# Altium PCB 电眼主板.PcbDoc (part 3 of 5)
Units mm, origin at the board's own origin, x right, y up, seen from the top; angles counter-clockwise.
Board outline 180 x 100 mm, 2 copper layers (Top Layer, Bottom Layer); 210 components, 262 nets, 810 pads, 212 vias.
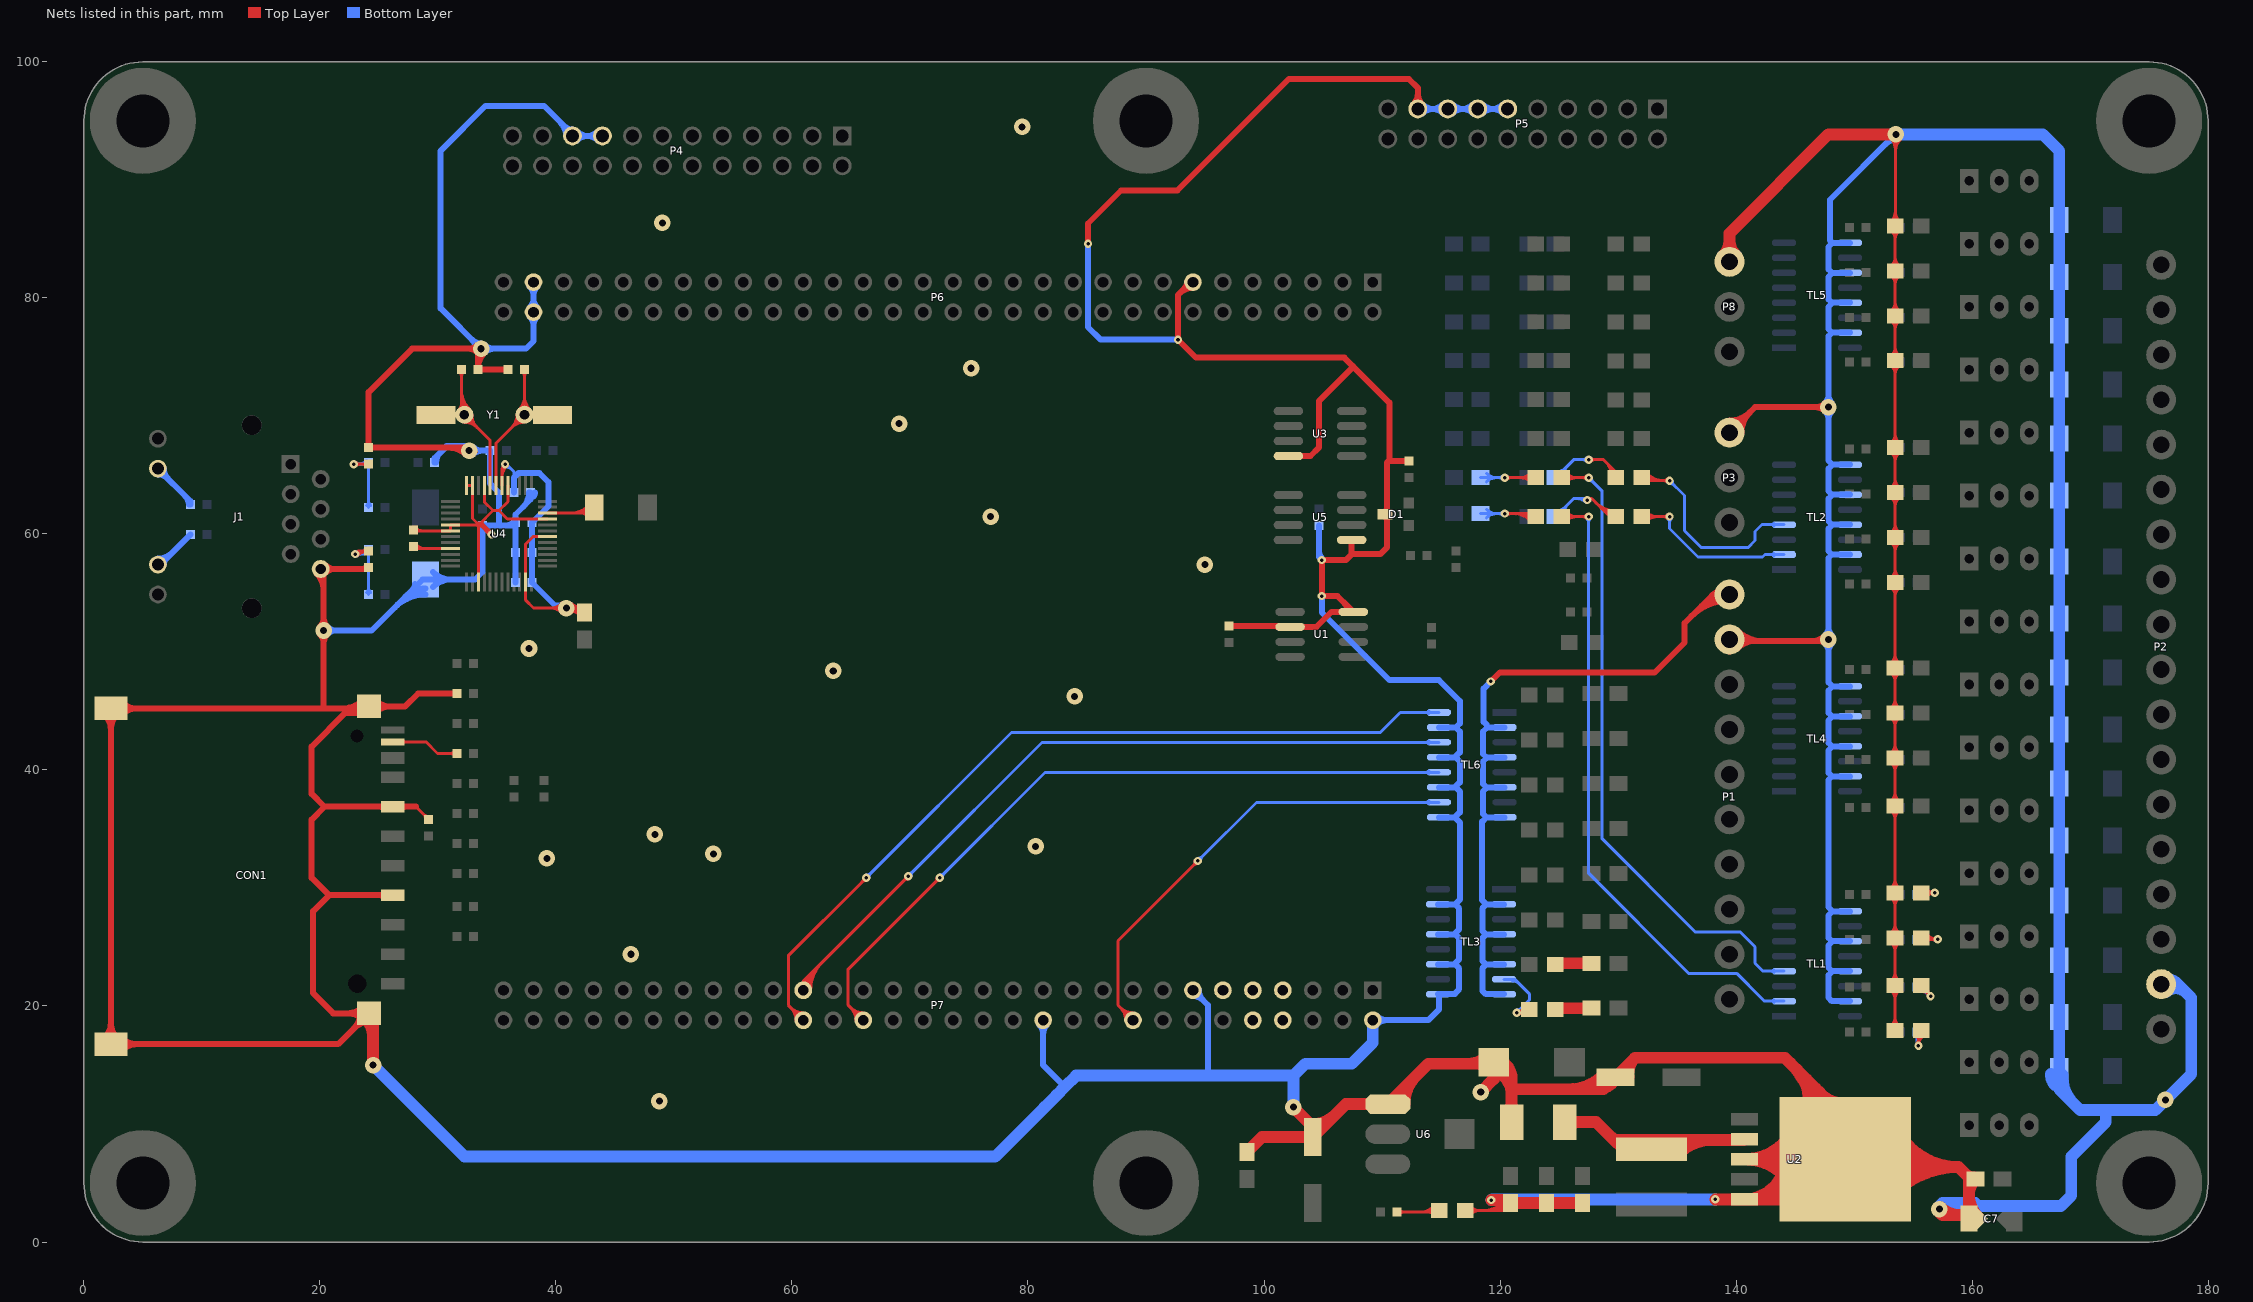
[diagram p3: the nets of this part, all layers, seen from the top]

## Via types
v1: diameter 0.7, hole 0.3, Top Layer to Bottom Layer, 163 vias
v2: diameter 1.4, hole 0.6, Top Layer to Bottom Layer, 49 vias

## Nets (pads, with @x,y where several pads share a name; then routed paths per layer and width w, separated by ;. In a path a pad name is that pad's centre, name@x,y a point inside that pad or via, vN(x,y) a via of type N, cw(c..) or ccw(c..) an arc to the next point about the centre after c; other vN are vias at no path point) (continued)
GND: C1.2 C2.1 C3.1 C4.1 C5.2 C6.2 C7.2 C8.2 C9.1 C10.1 C11.1 C12.2 C13.1 C14.1 C15.1 C16.1 C17.2 C18.2 C19.1 C20.1 CON1.3 CON1.6 CON1.12 CON1.13 CON1.14 CON1.15 CT1.2 CT2.2 D1.3 D2.2 DE1.1 DE2.1 DE3.1 DE4.1 DE5.1 DE6.1 DE7.1 DE8.1 DE9.1 DE10.1 DE11.1 DE12.1 DE13.1 DE14.1 DE15.1 DE16.1 J1.8 LED1.2 LED2.2 LED3.2 LED4.2 LED17.2 LED18.2 LED19.2 LED20.2 LED33.2 LED34.2 LED35.2 LED36.2 LED37.2 LED38.2 LED39.2 LED40.2 P1.9 P2.17 P3.3 P4.17 P4.19 P5.11 P5.13 P5.15 P5.17 P6.13 P6.57 P6.58 P7.2 P7.13 P7.24 P8.3 R26.2 R33.2 R35.1 R38.2 R39.1 TL1.9 TL1.11 TL1.13 TL1.15 TL2.9 TL2.11 TL2.13 TL2.15 TL3.9 TL3.11 TL3.13 TL3.15 TL4.9 TL4.11 TL4.13 TL4.15 TL5.9 TL5.11 TL5.13 TL5.15 TL6.9 TL6.11 TL6.13 TL6.15 U1.2 U1.8 U2.3 U2.5 U2.6 U3.4 U4.5 U4.6 U4.15 U4.33 U4.41 U4.45 U4.47 U4.48 U5.5 U6.1 V1.1 | length 1481.6
  Top Layer w0.254: C8.2@27.997,60.268 U4.6@31.083,60.268 U4.5@31.083,60.768 33.433,60.768 ; C8.2@28.12,60.145 cw(c28.416,59.849) 28.416,60.268 ; C8.2@28.12,60.505 ccw(c28.691,61.076) 28.691,60.268 ; 28.14,36.884 C2.1@29.21,35.814 ; C2.1@28.956,35.814 ccw(c28.343,35.814) 28.776,36.248 ccw(c29.21,36.681) C2.1@29.21,36.068 ; U4.48@32.433,64.118 U4.47@32.933,64.118 32.933,61.298 33.433,60.798 33.433,60.768 ; v2@32.433,66.85 v2(32.639,67.056) 32.766,66.929 v2@33.274,66.929 ; U4.15@33.433,55.918 33.433,60.768 ; U4.45@33.933,64.118 33.933,62.714 34.671,61.976 ; U4.41@35.933,64.118 35.933,62.73 35.179,61.976 ; U4.33@39.283,61.268 35.887,61.268 35.179,61.976 ; D2.2@117.043,2.667 120.269,2.667 C10.1@120.904,3.302 ; D2.2@117.467,2.308 cw(c118.335,1.441) 118.335,2.667 cw(c118.335,3.893) D2.2@117.467,3.026 ; 118.451,2.667 ccw(c118.451,5.628) C10.1@120.545,3.534 ; 119.064,2.667 ccw(c119.064,5.015) C10.1@120.724,3.355 ; 119.678,2.667 ccw(c119.678,4.401) C10.1@120.904,3.175 ; C10.1@120.291,2.667 ccw(c120.291,3.788) C10.1@121.084,2.995 ; P8.3@139.446,83.058 P8.3@139.446,83.185 ; LED1.2@153.108,18.266 ccw(c152.24,19.133) 153.467,19.133 ccw(c154.693,19.133) LED1.2@153.826,18.266 ; LED2.2@153.108,21.358 cw(c152.24,20.491) 153.467,20.491 cw(c154.693,20.491) LED2.2@153.826,21.358 ; LED2.2@153.108,22.076 ccw(c152.24,22.943) 153.467,22.943 ccw(c154.693,22.943) LED2.2@153.826,22.076 ; LED3.2@153.108,25.422 cw(c152.24,24.555) 153.467,24.555 cw(c154.693,24.555) LED3.2@153.826,25.422 ; LED3.2@153.108,26.14 ccw(c152.24,27.007) 153.467,27.007 ccw(c154.693,27.007) LED3.2@153.826,26.14 ; LED4.2@153.108,29.232 cw(c152.24,28.365) 153.467,28.365 cw(c154.693,28.365) LED4.2@153.826,29.232 ; LED4.2@153.108,29.95 ccw(c152.24,30.817) 153.467,30.817 ccw(c154.693,30.817) LED4.2@153.826,29.95 ; LED17.2@153.108,36.598 cw(c152.24,35.731) 153.467,35.731 cw(c154.693,35.731) LED17.2@153.826,36.598 ; LED17.2@153.108,37.316 ccw(c152.24,38.183) 153.467,38.183 ccw(c154.693,38.183) LED17.2@153.826,37.316 ; LED18.2@153.108,40.662 cw(c152.24,39.795) 153.467,39.795 cw(c154.693,39.795) LED18.2@153.826,40.662 ; LED18.2@153.108,41.38 ccw(c152.24,42.247) 153.467,42.247 ccw(c154.693,42.247) LED18.2@153.826,41.38 ; LED19.2@153.108,44.472 cw(c152.24,43.605) 153.467,43.605 cw(c154.693,43.605) LED19.2@153.826,44.472 ; LED19.2@153.108,45.19 ccw(c152.24,46.057) 153.467,46.057 ccw(c154.693,46.057) LED19.2@153.826,45.19 ; LED20.2@153.108,48.282 cw(c152.24,47.415) 153.467,47.415 cw(c154.693,47.415) LED20.2@153.826,48.282 ; LED20.2@153.108,49 ccw(c152.24,49.867) 153.467,49.867 ccw(c154.693,49.867) LED20.2@153.826,49 ; LED33.2@153.133,55.521 cw(c152.326,54.714) 153.467,54.714 ; LED33.2@153.133,56.239 ccw(c152.326,57.046) 153.467,57.046 ; LED34.2@153.133,59.331 cw(c152.326,58.524) 153.467,58.524 ; LED34.2@153.133,60.049 ccw(c152.326,60.856) 153.467,60.856 ; LED35.2@153.133,63.141 cw(c152.326,62.334) 153.467,62.334 ; LED35.2@153.133,63.859 ccw(c152.326,64.666) 153.467,64.666 ; LED36.2@153.133,66.951 cw(c152.326,66.144) 153.467,66.144 ; LED36.2@153.133,67.669 ccw(c152.326,68.476) 153.467,68.476 ; LED37.2@153.133,74.317 cw(c152.326,73.51) 153.467,73.51 ; LED37.2@153.133,75.035 ccw(c152.326,75.842) 153.467,75.842 ; LED38.2@153.133,78.127 cw(c152.326,77.32) 153.467,77.32 ; LED38.2@153.133,78.845 ccw(c152.326,79.652) 153.467,79.652 ; LED39.2@153.133,81.937 cw(c152.326,81.13) 153.467,81.13 ; LED39.2@153.133,82.655 ccw(c152.326,83.462) 153.467,83.462 ; LED40.2@153.133,85.747 cw(c152.326,84.94) 153.467,84.94 ; LED40.2@153.133,86.465 ccw(c152.266,87.332) 153.492,87.332 ccw(c154.718,87.332) LED40.2@153.851,86.465 ; v2@153.138,93.448 cw(c152.283,92.593) 153.492,92.593 ; LED1.2@153.467,17.907 LED2.2@153.467,21.717 LED3.2@153.467,25.781 LED4.2@153.467,29.591 LED17.2@153.467,36.957 LED18.2@153.467,41.021 LED19.2@153.467,44.831 LED20.2@153.467,48.641 153.467,63.5 153.467,74.676 153.467,86.081 LED40.2@153.492,86.106 153.492,93.802 v2(153.543,93.853) ; 153.467,54.593 cw(c154.779,54.593) LED33.2@153.851,55.521 ; 153.467,55.206 cw(c154.166,55.206) LED33.2@153.672,55.7 ; 153.467,56.554 ccw(c154.166,56.554) LED33.2@153.672,56.06 ; 153.467,57.167 ccw(c154.779,57.167) LED33.2@153.851,56.239 ; 153.467,58.403 cw(c154.779,58.403) LED34.2@153.851,59.331 ; 153.467,59.016 cw(c154.166,59.016) LED34.2@153.672,59.51 ; 153.467,60.364 ccw(c154.166,60.364) LED34.2@153.672,59.87 ; 153.467,60.977 ccw(c154.779,60.977) LED34.2@153.851,60.049 ; 153.467,62.213 cw(c154.779,62.213) LED35.2@153.851,63.141 ; 153.467,62.826 cw(c154.166,62.826) LED35.2@153.672,63.32 ; 153.467,64.174 ccw(c154.166,64.174) LED35.2@153.672,63.68 ; 153.467,64.787 ccw(c154.779,64.787) LED35.2@153.851,63.859 ; 153.467,66.023 cw(c154.779,66.023) LED36.2@153.851,66.951 ; 153.467,66.636 cw(c154.166,66.636) LED36.2@153.672,67.13 ; 153.467,67.984 ccw(c154.166,67.984) LED36.2@153.672,67.49 ; 153.467,68.597 ccw(c154.779,68.597) LED36.2@153.851,67.669 ; 153.467,73.389 cw(c154.779,73.389) LED37.2@153.851,74.317 ; 153.467,74.002 cw(c154.166,74.002) LED37.2@153.672,74.496 ; 153.467,75.35 ccw(c154.166,75.35) LED37.2@153.672,74.856 ; 153.467,75.963 ccw(c154.779,75.963) LED37.2@153.851,75.035 ; 153.467,77.199 cw(c154.779,77.199) LED38.2@153.851,78.127 ; 153.467,77.812 cw(c154.166,77.812) LED38.2@153.672,78.306 ; 153.467,79.16 ccw(c154.166,79.16) LED38.2@153.672,78.666 ; 153.467,79.773 ccw(c154.779,79.773) LED38.2@153.851,78.845 ; 153.467,81.009 cw(c154.779,81.009) LED39.2@153.851,81.937 ; 153.467,81.622 cw(c154.166,81.622) LED39.2@153.672,82.116 ; 153.467,82.97 ccw(c154.166,82.97) LED39.2@153.672,82.476 ; 153.467,83.583 ccw(c154.779,83.583) LED39.2@153.851,82.655 ; 153.467,84.819 cw(c154.779,84.819) LED40.2@153.851,85.747 ; 153.467,85.432 cw(c154.166,85.432) LED40.2@153.672,85.926 ; 153.492,92.347 cw(c155.049,92.347) v2@153.948,93.448 ; 153.492,92.96 cw(c154.436,92.96) v2@153.769,93.627 ; 33.433,60.768 33.463,60.768 33.493,60.798 34.671,61.976 ; 34.671,61.976 35.179,61.976
  Top Layer w0.508: CON1.15@1.758,17.292 ccw(c0.485,18.565) 2.286,18.565 ccw(c4.087,18.565) CON1.15@2.814,17.292 ; CON1.14@1.758,44.684 cw(c0.485,43.411) 2.286,43.411 cw(c4.087,43.411) CON1.14@2.814,44.684 ; CON1.14@2.458,45.384 CON1.14@2.286,45.212 ; CON1.15@3.213,16.236 cw(c4.487,14.963) 4.487,16.764 cw(c4.487,18.565) CON1.15@3.213,17.292 ; CON1.14@3.213,44.684 cw(c4.487,43.411) 4.487,45.212 cw(c4.487,47.013) CON1.14@3.213,45.74 ; J1.8@19.707,56.669 cw(c18.226,55.188) 20.32,55.188 ; v2@20.005,51.501 cw(c19.243,50.739) 20.32,50.739 cw(c21.397,50.739) v2@20.635,51.501 ; v2@20.005,52.131 ccw(c19.243,52.893) 20.32,52.893 ccw(c21.397,52.893) v2@20.635,52.131 ; J1.8@20.425,56.669 cw(c21.292,55.802) 21.292,57.028 cw(c21.292,58.254) J1.8@20.425,57.387 ; 21.946,45.212 ccw(c21.946,47.6) CON1.13@23.635,45.912 ; 22.776,45.212 cw(c22.776,43.998) CON1.13@23.635,44.857 ; 22.945,44.831 ccw(c22.945,45.924) CON1.13@23.944,45.481 ; CON1.13@23.172,45.212 ccw(c23.172,46.374) CON1.13@23.994,45.552 ; CON1.12@23.416,19.384 cw(c21.615,19.384) 22.889,18.111 cw(c24.162,16.837) CON1.12@24.162,18.638 ; CON1.13@23.48,45.687 cw(c22.164,46.271) 22.164,44.831 ; 23.529,57.028 ccw(c23.529,57.751) C20.1@24.04,57.24 ; CON1.12@23.635,18.857 ccw(c22.361,17.583) 22.361,19.384 ccw(c22.361,21.185) CON1.12@23.635,19.912 ; CON1.13@23.876,44.831 22.164,44.831 ; C20.1@24.13,57.15 24.008,57.028 J1.8@20.066,57.028 20.32,56.774 v2(20.32,51.816) 20.32,45.212 ; CON1.13@24.162,45.212 20.32,45.212 ; CON1.13@24.162,45.384 27.223,45.384 28.321,46.482 R26.2@31.623,46.482 ; CON1.13@24.69,44.857 cw(c25.963,43.583) 25.963,45.384 cw(c25.963,47.185) CON1.13@24.69,45.912 ; CON1.3@25.488,29.21 ccw(c25.068,28.79) 25.068,29.384 ccw(c25.068,29.978) CON1.3@25.488,29.558 ; CON1.6@25.488,36.71 ccw(c25.068,36.29) 25.068,36.884 ccw(c25.068,37.478) CON1.6@25.488,37.058 ; CON1.3@26.162,29.384 20.781,29.384 ; CON1.6@26.836,36.71 cw(c27.256,36.29) 27.256,36.884 cw(c27.256,37.478) CON1.6@26.836,37.058 ; 28.14,36.884 CON1.6@26.162,36.884 20.393,36.884 ; 30.949,67.31 cw(c30.949,65.366) v2@32.324,66.741 ; v2(32.639,67.056) 32.385,67.31 C19.1@24.13,67.31 24.13,72.009 27.813,75.692 v2(33.655,75.692) 33.401,75.438 C18.2@33.401,73.914 C17.2@35.941,73.914 ; v2@33.34,75.377 ccw(c32.578,74.615) 32.578,75.692 ccw(c32.578,76.769) v2@33.34,76.007 ; C18.2@33.401,74.002 cw(c35.345,74.002) v2@33.97,75.377 ; 33.433,60.798 33.493,60.798 33.69,60.798 v1(34.544,59.944) ; v1(85.09,84.582) 85.09,86.306 87.884,89.1 92.656,89.1 102.108,98.552 112.268,98.552 113.03,97.79 P5.17@113.03,96.012 ; 92.795,80.349 cw(c93.98,79.165) P6.13@93.98,80.84 ; 93.273,80.827 ccw(c92.765,81.336) P6.13@93.484,81.336 ; P6.13@93.98,81.336 93.782,81.336 92.71,80.264 v1(92.71,76.454) 94.234,74.93 106.807,74.93 107.521,74.216 ; C1.2@97.028,52.197 102.135,52.197 U1.2@102.211,52.121 104.445,52.121 105.715,53.391 U1.8@107.568,53.391 ; 100.895,52.197 cw(c100.895,51.705) U1.2@101.243,52.053 ; U3.4@102.071,66.599 103.937,66.599 104.648,67.31 104.648,71.247 107.521,74.12 107.521,74.216 ; 105.537,57.785 v1(104.902,57.785) ; 106.735,54.224 cw(c105.902,53.391) U1.8@107.08,53.391 ; U5.5@107.428,59.487 107.428,58.293 ; U1.8@108.128,53.391 U1.8@107.568,53.391 ; D1.3@110.27,61.528 cw(c109.944,61.202) 110.405,61.202 ; D1.3@110.27,61.815 ccw(c109.944,62.141) 110.405,62.141 ; 110.405,61.159 cw(c110.926,61.159) D1.3@110.557,61.528 ; 110.405,62.183 ccw(c110.926,62.183) D1.3@110.557,61.815 ; 110.405,64.571 110.405,65.405 ; R38.2@112.268,66.167 110.532,66.167 ; P5.17@112.644,96.398 ccw(c111.712,97.33) 113.03,97.33 ccw(c114.348,97.33) P5.17@113.416,96.398 ; P1.9@139.446,50.292 140.081,50.927 147.701,50.927 v2(147.828,51.054) ; P3.3@139.446,68.58 141.605,70.739 v2(147.828,70.739) ; P3.3@139.446,69.596 ccw(c139.446,72.049) 141.18,70.314 ccw(c142.915,68.58) P3.3@140.462,68.58 ; P1.9@139.805,51.413 ccw(c140.979,52.587) 140.979,50.927 ; P1.9@140.164,50.336 cw(c141.592,48.908) 141.592,50.927 ; P1.9@140.164,51.772 ccw(c142.205,53.813) 142.205,50.927 ; 146.445,50.927 ccw(c146.445,52.437) v2@147.513,51.369 ; 147.058,50.927 cw(c147.058,50.284) v2@147.513,50.739 ; v2@147.513,70.424 ccw(c146.751,69.662) 146.751,70.739 ccw(c146.751,71.816) v2@147.513,71.054 ; CON1.14@2.286,45.212 CON1.15@2.286,16.764 21.542,16.764 CON1.12@24.162,19.384 21.129,19.384 19.431,21.082 19.431,28.034 20.781,29.384 ; CON1.14@2.286,45.212 20.32,45.212 ; 20.393,36.884 19.304,37.973 19.304,41.971 22.164,44.831 ; 20.393,36.884 19.304,35.795 19.304,30.861 20.781,29.384 ; v1(104.902,57.785) v1(104.902,54.737) 106.222,54.737 U1.8@107.568,53.391 ; v1(104.902,57.785) 106.934,57.785 107.428,58.279 107.428,58.293 ; 107.428,58.293 109.855,58.293 110.405,58.843 110.405,65.405 ; 107.521,74.216 110.617,71.12 110.617,66.252 110.532,66.167 ; 110.405,65.405 110.405,66.04 110.532,66.167
  Top Layer w1: CON1.12@23.808,19.03 cw(c22.112,17.334) 24.511,17.334 ; CON1.12@24.162,19.384 24.511,19.035 v2(24.511,14.986) ; C11.1@98.552,7.62 99.828,8.896 C12.2@104.14,8.896 ; v2(102.489,11.43) 104.14,9.779 C12.2@104.14,8.896 ; C12.2@104.14,9.996 ccw(c104.14,12.652) 106.018,10.774 ; U6.1@111.893,11.683 cw(c115.285,11.683) 112.887,14.082 ; 117.38,15.113 ccw(c117.38,17.252) CT1.2@118.893,15.74 ; 117.994,15.113 cw(c117.994,13.841) CT1.2@118.893,14.74 ; v2(118.364,12.7) 119.482,13.818 ; CT1.2@119.055,14.677 cw(c118.403,13.818) 119.482,13.818 ; v1(119.253,3.556) 120.65,3.556 C10.1@120.904,3.302 C6.2@123.952,3.302 C4.1@127,3.302 ; CT1.2@119.403,14.554 cw(c118.911,12.544) 120.98,12.544 ; CT1.2@119.57,14.534 cw(c119.57,13.042) CT1.2@120.625,14.097 ; CT1.2@119.64,15.525 cw(c119.222,13.818) 120.98,13.818 ; CT1.2@119.908,14.677 ccw(c120.56,13.818) 119.482,13.818 ; C10.1@120.271,3.556 cw(c120.271,2.796) C10.1@120.809,3.334 ; CT1.2@120.277,15.24 ccw(c122.197,15.24) 120.839,13.882 ; V1.1@120.627,11.014 ccw(c119.773,11.867) 120.98,11.867 ccw(c122.187,11.867) V1.1@121.334,11.014 ; V1.1@120.98,10.16 120.98,12.941 ; 125.851,12.941 ccw(c125.851,17.057) C5.2@128.761,14.147 ; 128.265,12.941 ccw(c128.265,14.643) C5.2@129.468,13.44 ; C5.2@130.886,14.002 cw(c132.812,14.248) 131.439,15.621 ; v1(138.234,3.614) U2.5@140.716,3.614 ; P8.3@138.902,83.602 ccw(c137.587,84.917) 139.446,84.917 ccw(c141.305,84.917) P8.3@139.99,83.602 ; P1.9@139.444,50.29 P1.9@139.446,50.292 ; P8.3@139.446,83.058 139.446,85.471 147.828,93.853 v2(153.543,93.853) ; U2.5@141.722,3.614 ccw(c141.722,7.055) U2.6@145.162,7.035 ; 142.727,3.614 ccw(c142.727,7.049) U2.6@146.162,7.03 ; U2.6@143.733,3.614 ccw(c143.733,7.043) U2.6@147.162,7.024 ; U2.6@144.162,7.041 cw(c140.716,7.06) U2.5@140.716,3.614 ; 144.535,15.231 cw(c139.416,10.113) U2.6@146.298,7.869 ; U2.6@144.739,3.614 ccw(c144.739,7.038) U2.6@148.162,7.018 ; U2.6@144.791,4.651 ccw(c140.716,2.32) U2.3@140.716,7.014 ; U2.6@144.791,9.377 cw(c140.716,11.708) U2.3@140.716,7.014 ; 145.15,14.616 cw(c142.813,12.279) U2.6@145.317,10.121 ; U2.6@145.659,5.148 ccw(c142.441,3.307) 142.441,7.014 ccw(c142.441,10.721) U2.6@145.659,8.88 ; 145.687,14.079 cw(c141.154,9.546) U2.6@147.249,7.559 ; 145.912,13.854 cw(c143.631,11.574) U2.6@146.074,9.468 ; U2.6@146.131,10.868 ccw(c144.805,12.7) 147.066,12.7 ; 146.673,13.093 cw(c144.449,10.869) U2.6@146.831,8.815 ; 146.84,12.926 cw(c142.893,8.979) U2.6@148.2,7.249 ; U2.6@151.984,8.366 ccw(c155.432,10.305) 155.432,6.35 ; U2.6@152.358,4.483 cw(c156.587,0.628) 156.587,6.35 ; U2.6@152.856,8.856 ccw(c157.141,11.267) 157.141,6.35 ; U2.6@153.097,3.809 cw(c158.851,-1.436) 158.851,6.35 ; U2.6@153.727,9.347 ccw(c158.851,12.229) 158.851,6.35 ; U2.6@153.978,2.286 U2.6@149.25,7.014 ; v2(157.226,2.794) 157.226,2.54 157.48,2.286 C7.2@159.436,2.286 ; v2@157.367,2.935 ccw(c158.935,4.503) 158.935,2.286 ; 159.028,2.286 ccw(c159.028,3.083) C7.2@159.591,2.519 ; C7.2@159.104,2.286 cw(c159.104,0.735) C7.2@160.201,1.832 ; 159.44,5.762 ccw(c160.147,6.469) R39.1@160.147,5.469 ; 159.741,3.963 ccw(c162.332,3.963) C7.2@160.5,2.131 ; 159.741,4.027 cw(c161.454,4.027) R39.1@160.242,5.239 ; C7.2@160.169,1.872 ccw(c159.436,1.429) C7.2@159.436,2.286 ; C7.2@160.35,1.981 C7.2@159.741,1.981 ; C12.2@104.14,8.896 106.927,11.683 U6.1@110.488,11.683 113.918,15.113 119.355,15.113 CT1.2@119.482,15.24 ; 119.482,13.818 CT1.2@119.482,15.24 ; CT1.2@119.482,15.24 120.98,13.741 120.98,12.941 ; 120.98,12.941 128.759,12.941 C5.2@129.788,13.97 131.439,15.621 ; 131.439,15.621 133.223,15.621 133.731,15.621 144.145,15.621 147.066,12.7 ; U2.5@140.716,3.614 145.85,3.614 U2.6@149.25,7.014 ; U2.3@140.716,7.014 U2.6@149.25,7.014 ; 147.066,12.7 147.066,9.198 U2.6@149.25,7.014 ; U2.6@149.25,7.014 149.914,6.35 158.852,6.35 ; 158.852,6.35 159.741,5.461 C7.2@159.741,1.981 ; C7.2@159.436,2.286 C7.2@159.741,1.981 ; 147.339,12.427 ccw(c148.92,14.007) 148.92,11.772 cw(c148.92,14.007) 147.339,12.427
  Bottom Layer w0.254: C14.1@36.322,60.706 C14.1@36.576,60.96 ; 104.648,58.039 v1(104.902,57.785)
  Bottom Layer w0.508: v2(20.32,51.816) 24.384,51.816 28.702,56.134 CT2.2@28.956,56.134 33.147,56.134 33.782,56.769 C9.1@33.782,60.706 ; v2@20.635,51.501 cw(c21.397,50.739) 21.397,51.816 cw(c21.397,52.893) v2@20.635,52.131 ; 26.354,53.786 cw(c28.956,51.185) CT2.2@28.956,54.864 ; 27.222,54.654 cw(c28.956,52.919) CT2.2@28.956,55.372 ; CT2.2@27.887,55.319 ccw(c27.454,55.753) CT2.2@28.067,55.753 ; CT2.2@29.585,55.505 cw(c31.102,53.988) 31.102,56.134 cw(c31.102,58.28) CT2.2@29.585,56.763 ; R35.1@29.718,66.04 29.718,66.421 30.734,67.437 ; R35.1@29.845,66.04 cw(c31.071,66.04) 30.204,66.907 ; 31.904,67.437 cw(c31.904,66.369) v2@32.684,67.098 ; v2@32.313,66.751 ccw(c30.734,65.276) 30.734,67.437 ; v2@32.954,66.741 cw(c33.716,65.979) 33.716,67.056 cw(c33.716,68.133) v2@32.954,67.371 ; v2@33.209,75.692 ccw(c32.132,75.692) 32.894,76.453 ccw(c33.655,77.215) v2@33.655,76.138 ; v2@33.97,75.377 cw(c34.732,74.615) 34.732,75.692 cw(c34.732,76.769) v2@33.97,76.007 ; v1(34.544,59.944) C9.1@33.782,60.706 ; 35.656,60.706 ccw(c35.656,61.88) C14.1@36.486,61.05 ; C14.1@36.322,60.706 35.306,60.706 ; C16.1@36.576,55.88 C13.1@36.576,58.42 C14.1@36.576,60.96 36.576,61.648 37.846,62.918 C15.1@37.846,63.5 ; 37.218,62.29 ccw(c36.007,63.5) C15.1@37.719,63.5 ; P6.58@37.749,78.445 cw(c36.903,77.599) 38.1,77.599 cw(c39.297,77.599) P6.58@38.451,78.445 ; P6.58@37.749,79.147 ccw(c36.903,79.993) 38.1,79.993 ccw(c39.297,79.993) P6.58@38.451,79.147 ; P6.57@37.749,80.985 cw(c36.903,80.139) 38.1,80.139 cw(c39.297,80.139) P6.57@38.451,80.985 ; C15.1@38.085,63.157 ccw(c37.742,63.5) 38.227,63.5 ; P6.57@38.1,81.336 P6.58@38.1,78.796 38.1,76.327 37.465,75.692 v2(33.655,75.692) 30.226,79.121 30.226,92.456 30.407,92.637 34.036,96.266 38.989,96.266 41.402,93.853 P4.19@41.402,93.726 P4.17@43.942,93.726 ; 40.38,94.875 cw(c39.231,93.726) P4.19@40.856,93.726 ; 40.687,94.568 ccw(c41.402,95.284) P4.19@41.402,94.272 ; P4.19@41.788,93.34 cw(c42.72,92.408) 42.72,93.726 cw(c42.72,95.044) P4.19@41.788,94.112 ; P4.17@43.556,93.34 ccw(c42.624,92.408) 42.624,93.726 ccw(c42.624,95.044) P4.17@43.556,94.112 ; P7.24@80.929,18.445 cw(c80.083,17.599) 81.28,17.599 cw(c82.477,17.599) P7.24@81.631,18.445 ; P7.24@81.28,18.796 81.28,14.986 83.121,13.144 ; v1(85.09,84.582) 85.09,77.526 86.162,76.454 v1(92.71,76.454) ; P7.13@93.98,20.84 cw(c93.98,19.643) 94.827,20.489 cw(c95.673,21.336) P7.13@94.476,21.336 ; P7.13@93.98,21.336 95.25,20.066 95.25,14.097 ; 104.648,58.039 C3.1@104.648,60.706 ; 104.648,58.63 ccw(c105.747,58.63) v1@104.97,57.853 ; v1(104.902,54.737) 104.902,53.34 110.617,47.625 114.808,47.625 116.586,45.847 116.586,43.939 116.248,43.601 ; P7.2@109.22,18.796 113.919,18.796 114.808,19.685 114.808,20.936 TL3.9@114.749,20.995 116.106,20.995 ; P7.2@109.571,18.445 cw(c110.417,17.599) 110.417,18.796 cw(c110.417,19.993) P7.2@109.571,19.147 ; P5.17@113.03,96.012 P5.15@115.57,96.012 P5.13@118.11,96.012 P5.11@120.65,96.012 ; P5.17@113.416,95.626 cw(c114.348,94.694) 114.348,96.012 cw(c114.348,97.33) P5.17@113.416,96.398 ; TL3.11@114.749,23.535 116.106,23.535 ; TL3.13@114.749,26.075 116.106,26.075 ; TL3.15@114.749,28.615 116.189,28.615 ; TL6.9@114.808,35.981 116.165,35.981 ; TL6.11@114.808,38.521 116.165,38.521 ; TL6.13@114.808,41.061 116.165,41.061 ; TL6.15@114.808,43.601 116.248,43.601 ; P5.15@115.184,95.626 ccw(c114.252,94.694) 114.252,96.012 ccw(c114.252,97.33) P5.15@115.184,96.398 ; P5.15@115.956,95.626 cw(c116.888,94.694) 116.888,96.012 cw(c116.888,97.33) P5.15@115.956,96.398 ; 116.189,20.995 116.106,20.995 ; 116.248,35.981 116.165,35.981 ; P5.13@117.724,95.626 ccw(c116.792,94.694) 116.792,96.012 ccw(c116.792,97.33) P5.13@117.724,96.398 ; P5.13@118.496,95.626 cw(c119.428,94.694) 119.428,96.012 cw(c119.428,97.33) P5.13@118.496,96.398 ; P5.11@120.264,95.626 ccw(c119.332,94.694) 119.332,96.012 ccw(c119.332,97.33) P5.11@120.264,96.398 ; v2@147.513,50.739 cw(c146.751,49.977) 147.828,49.977 cw(c148.905,49.977) v2@148.143,50.739 ; v2@147.513,51.369 ccw(c146.751,52.131) 147.828,52.131 ccw(c148.905,52.131) v2@148.143,51.369 ; v2@147.513,70.424 cw(c146.751,69.662) 147.828,69.662 cw(c148.905,69.662) v2@148.143,70.424 ; v2@147.513,71.054 ccw(c146.751,71.816) 147.828,71.816 ccw(c148.905,71.816) v2@148.143,71.054 ; TL1.15@149.665,20.407 148.122,20.407 147.828,20.701 147.828,22.606 148.169,22.947 ; TL1.13@149.665,22.947 148.169,22.947 ; TL1.11@149.665,25.487 148.169,25.487 ; TL1.9@149.665,28.027 148.169,28.027 ; TL4.15@149.665,39.457 148.122,39.457 ; TL4.13@149.665,41.997 148.169,41.997 ; TL4.11@149.665,44.537 148.169,44.537 ; TL4.9@149.665,47.077 148.169,47.077 ; TL2.15@149.665,58.253 148.122,58.253 ; TL2.13@149.665,60.793 148.169,60.793 ; TL2.11@149.665,63.333 148.169,63.333 ; TL2.9@149.665,65.873 148.169,65.873 ; TL5.15@149.665,77.049 148.122,77.049 ; TL5.13@149.665,79.589 148.169,79.589 ; TL5.11@149.665,82.129 148.169,82.129 ; TL5.9@149.665,84.669 148.169,84.669 ; 152.695,93.056 cw(c153.543,92.207) v2@153.543,93.407 ; 152.818,93.179 ccw(c152.143,93.853) v2@153.097,93.853 ; v2@153.492,93.853 147.955,88.316 147.955,84.883 148.169,84.669 ; 30.734,67.437 32.258,67.437 v2(32.639,67.056) R33.2@34.417,67.056 34.424,67.049 34.424,64.255 35.179,63.5 35.179,60.833 35.306,60.706 ; C9.1@33.782,60.706 35.306,60.706 ; 116.106,20.995 116.53,21.419 116.53,23.194 116.189,23.535 116.106,23.535 ; 116.106,23.535 116.53,23.959 116.53,25.734 116.189,26.075 116.106,26.075 ; 116.106,26.075 116.53,26.499 116.53,28.274 116.189,28.615 ; 116.165,35.981 116.586,35.56 116.586,29.012 116.189,28.615 ; 116.165,35.981 116.589,36.405 116.589,38.18 116.248,38.521 116.165,38.521 ; 116.165,38.521 116.589,38.945 116.589,40.72 116.248,41.061 116.165,41.061 ; 116.165,41.061 116.589,41.485 116.589,43.26 116.248,43.601 ; 148.122,39.457 147.828,39.163 147.828,28.368 148.169,28.027 ; 148.122,39.457 147.828,39.751 147.828,41.656 148.169,41.997 ; 148.122,58.253 147.828,57.959 v2(147.828,51.054) 147.828,47.418 148.169,47.077 ; 148.122,58.253 147.828,58.547 147.828,60.452 148.169,60.793 ; 148.122,77.049 147.828,76.755 v2(147.828,70.739) 147.828,66.214 148.169,65.873 ; 148.122,77.049 147.828,77.343 147.828,79.248 148.169,79.589 ; 148.169,22.947 148.122,22.947 147.828,23.241 147.828,25.146 148.169,25.487 ; 148.169,25.487 148.122,25.487 147.828,25.781 147.828,27.686 148.169,28.027 ; 148.169,41.997 148.122,41.997 147.828,42.291 147.828,44.196 148.169,44.537 ; 148.169,44.537 148.122,44.537 147.828,44.831 147.828,46.736 148.169,47.077 ; 148.169,60.793 148.122,60.793 147.828,61.087 147.828,62.992 148.169,63.333 ; 148.169,63.333 148.122,63.333 147.828,63.627 147.828,65.532 148.169,65.873 ; 148.169,79.589 148.122,79.589 147.828,79.883 147.828,81.788 148.169,82.129 ; 148.169,82.129 148.122,82.129 147.828,82.423 147.828,84.328 148.169,84.669
  Bottom Layer w1: v2(24.511,14.986) 32.258,7.239 77.216,7.239 82.423,12.446 ; 81.407,11.43 82.423,12.446 ; v2(102.489,11.43) 102.489,14.097 ; P7.2@109.22,18.796 109.22,16.891 107.442,15.113 103.505,15.113 102.489,14.097 ; v1(119.253,3.556) 119.311,3.614 v1(138.234,3.614) ; v2@153.492,93.853 v2(153.543,93.853) 165.989,93.853 167.386,92.456 DE16.1@167.386,86.614 DE15.1@167.386,81.788 DE14.1@167.386,77.216 DE13.1@167.386,72.644 DE12.1@167.386,68.072 DE11.1@167.386,63.246 DE10.1@167.386,57.658 DE9.1@167.386,52.832 DE8.1@167.386,48.26 DE7.1@167.386,43.434 DE6.1@167.386,38.862 DE5.1@167.386,34.036 DE4.1@167.386,28.956 DE3.1@167.386,23.876 DE2.1@167.386,19.05 DE1.1@167.386,14.478 167.386,12.954 169.164,11.176 171.323,11.176 ; v2(157.226,2.794) 157.226,3.048 157.48,3.302 160.274,3.302 160.528,3.048 167.513,3.048 168.402,3.937 168.402,7.239 171.323,10.16 171.323,11.176 ; v2@157.367,2.653 cw(c158.935,1.085) 158.935,3.302 ; DE1.1@166.688,14.236 ccw(c167.852,14.139) 167.026,13.314 ; DE1.1@167.685,14.153 ccw(c170.67,13.906) 168.552,11.788 ; P2.17@175.879,22.024 cw(c176.554,21.171) 177.323,21.94 ; P2.17@175.993,22.072 cw(c176.266,19.898) 177.815,21.448 ; P2.17@176.022,21.844 177.419,21.844 ; P2.17@176.499,21.24 cw(c177.255,20.283) 178.117,21.146 ; P2.17@176.673,21.433 cw(c177.419,20.962) 177.419,21.844 ; P2.17@176.673,22.255 ccw(c177.419,22.726) 177.419,21.844 ; 82.423,12.446 83.121,13.144 84.074,14.097 95.25,14.097 102.489,14.097 ; 171.323,11.176 175.514,11.176 178.562,14.224 178.562,20.701 177.419,21.844
  other v2: 48.768,11.938 176.382,12.044 46.355,24.384 39.243,32.512 53.34,32.893 80.645,33.528 48.387,34.544 83.947,46.228 63.5,48.387 37.719,50.292 94.996,57.404 76.835,61.468 69.088,69.342 75.184,74.041 49.022,86.36 79.502,94.488
I2C1_SCL: P7.10
I2C1_SDA: P7.9
INPUT0: P7.40 TL6.16 | length 75.7
  Top Layer w0.254: P7.40@60.337,18.796 ccw(c58.833,18.796) 59.896,19.86 ccw(c60.96,20.923) P7.40@60.96,19.419 ; P7.40@60.591,18.796 ccw(c59.7,18.796) 60.33,19.426 ccw(c60.96,20.056) P7.40@60.96,19.165 ; P7.40@60.96,18.796 59.69,20.066 59.69,24.257 65.82,30.387 v1(66.294,30.861) ; v1@66.071,30.861 cw(c65.533,30.861) 65.913,30.48 cw(c66.294,30.1) v1@66.294,30.638
  Bottom Layer w0.254: v1(66.294,30.861) 78.613,43.18 109.855,43.18 111.546,44.871 TL6.16@114.808,44.871 ; v1@66.294,31.084 ccw(c66.294,31.622) 66.675,31.242 ccw(c67.055,30.861) v1@66.517,30.861 ; TL6.16@113.964,44.763 ccw(c113.703,44.503) 113.703,44.871 ccw(c113.703,45.239) TL6.16@113.964,44.979
INPUT1: P7.39 TL6.14 | length 72.9
  Top Layer w0.254: P7.39@60.821,21.336 cw(c62.325,21.336) 61.262,22.4 ; P7.39@60.96,21.336 60.96,22.098 v1(69.85,30.988) ; P7.39@61.075,21.336 cw(c63.192,21.336) 61.695,22.833 ; P7.39@61.329,21.336 cw(c64.059,21.336) 62.129,23.267 ; P7.39@61.583,21.336 cw(c64.927,21.336) 62.562,23.7 ; v1@69.627,30.988 cw(c69.089,30.988) 69.469,30.607 cw(c69.85,30.227) v1@69.85,30.765
  Bottom Layer w0.254: v1(69.85,30.988) 81.193,42.331 TL6.14@114.808,42.331 ; v1@69.85,31.211 ccw(c69.85,31.749) 70.231,31.369 ccw(c70.611,30.988) v1@70.073,30.988 ; TL6.14@113.964,42.223 ccw(c113.703,41.963) 113.703,42.331 ccw(c113.703,42.699) TL6.14@113.964,42.439
INPUT2: P7.36 TL6.12 | length 67.8
  Top Layer w0.254: P7.36@65.417,18.796 ccw(c63.913,18.796) 64.976,19.86 ccw(c66.04,20.923) P7.36@66.04,19.419 ; P7.36@65.671,18.796 ccw(c64.78,18.796) 65.41,19.426 ccw(c66.04,20.056) P7.36@66.04,19.165 ; P7.36@66.04,18.796 64.77,20.066 64.77,23.114 72.39,30.734 v1@72.39,30.861 ; v1@72.294,30.861 cw(c71.756,30.861) 72.136,30.48 cw(c72.517,30.1) v1@72.517,30.638
  Bottom Layer w0.254: v1(72.517,30.861) 81.447,39.791 TL6.12@114.808,39.791 ; v1@72.517,31.084 ccw(c72.517,31.622) 72.898,31.242 ccw(c73.278,30.861) v1@72.74,30.861 ; TL6.12@113.964,39.683 ccw(c113.703,39.423) 113.703,39.791 ccw(c113.703,40.159) TL6.12@113.964,39.899
INPUT3: P7.18 TL6.10 | length 45.3
  Top Layer w0.254: P7.18@88.277,18.796 ccw(c86.773,18.796) 87.836,19.86 ccw(c88.9,20.923) P7.18@88.9,19.419 ; P7.18@88.531,18.796 ccw(c87.64,18.796) 88.27,19.426 ccw(c88.9,20.056) P7.18@88.9,19.165 ; P7.18@88.9,18.796 87.63,20.066 87.63,25.527 v1(94.392,32.289) ; v1@94.169,32.289 cw(c93.63,32.289) 94.011,31.908 cw(c94.392,31.527) v1@94.392,32.066
  Bottom Layer w0.254: v1(94.392,32.289) 99.354,37.251 TL6.10@114.808,37.251 ; v1@94.392,32.512 ccw(c94.392,33.05) 94.772,32.669 ccw(c95.153,32.289) v1@94.615,32.289 ; TL6.10@113.964,37.143 ccw(c113.703,36.883) 113.703,37.251 ccw(c113.703,37.619) TL6.10@113.964,37.359
LED0: P7.8
LED1: P7.7
LED2: P7.11
LEDA: J1.10 R41.2 | length 6.9
  Bottom Layer w0.508: J1.10@6.276,65.036 cw(c6.276,63.839) 7.123,64.685 cw(c7.969,65.532) J1.10@6.772,65.532 ; J1.10@6.276,65.532 9.017,62.791 R41.2@9.017,62.484 ; 8.583,63.225 cw(c7.842,62.484) R41.2@8.89,62.484
LEDB: J1.11 R40.2 | length 5.7
  Bottom Layer w0.508: J1.11@6.276,57.404 6.477,57.404 R40.2@9.017,59.944 ; J1.11@6.276,57.9 ccw(c6.276,59.583) 7.466,58.393 ; J1.11@6.772,57.404 cw(c7.484,57.404) 6.981,57.908
N24V1: P1.10 TL3.2 TL3.4 TL3.6 TL3.8 TL6.2 TL6.4 TL6.6 TL6.8 | length 74.3
  Top Layer w0.508: v1(119.22,47.498) 119.982,48.26 133.096,48.26 135.636,50.8 135.636,52.451 138.049,54.864 ; 136.194,53.009 cw(c139.446,49.757) P1.10@139.446,54.356 ; 137.061,53.876 cw(c139.446,51.491) P1.10@139.446,54.864 138.049,54.864 ; 137.928,54.743 cw(c139.446,53.226) P1.10@139.446,55.372 ; P1.10@138.479,54.551 ccw(c138.049,54.412) 138.049,54.864 ; P1.10@138.479,55.177 cw(c138.049,55.316) 138.049,54.864
  Bottom Layer w0.508: v1(119.22,47.498) 118.618,46.896 118.618,44.069 118.9,43.787 118.9,43.601 ; TL3.8@120.337,20.995 118.794,20.995 118.5,21.289 118.5,23.194 118.841,23.535 ; TL3.6@120.337,23.535 118.841,23.535 ; TL3.4@120.337,26.075 118.841,26.075 ; TL3.2@120.337,28.615 118.841,28.615 ; TL6.8@120.396,35.981 118.853,35.981 ; TL6.6@120.396,38.521 118.9,38.521 ; TL6.4@120.396,41.061 118.9,41.061 ; TL6.2@120.396,43.601 118.9,43.601 ; 118.841,23.535 118.794,23.535 118.5,23.829 118.5,25.734 118.841,26.075 ; 118.841,26.075 118.794,26.075 118.5,26.369 118.5,28.274 118.841,28.615 ; 118.841,28.615 118.491,28.965 118.491,35.619 118.853,35.981 ; 118.853,35.981 118.559,36.275 118.559,38.18 118.9,38.521 ; 118.9,38.521 118.853,38.521 118.559,38.815 118.559,40.72 118.9,41.061 ; 118.9,41.061 118.853,41.061 118.559,41.355 118.559,43.26 118.9,43.601
NCD_SD: CON1.11 R25.2 | length 7.5
  Top Layer w0.254: CON1.11@26.162,42.384 28.99,42.384 29.972,41.402 R25.2@31.623,41.402 ; CON1.11@26.984,42.262 cw(c27.28,41.966) 27.28,42.384 cw(c27.28,42.802) CON1.11@26.984,42.506 ; R25.2@31.443,41.222 ccw(c31.01,40.789) 31.01,41.402 ccw(c31.01,42.015) R25.2@31.443,41.582
NetC8_1: C8.1 U4.9 | length 4.5
  Top Layer w0.254: C8.1@28.12,59.108 ccw(c28.939,59.927) 28.939,58.768 ; 28.326,58.768 cw(c28.326,59.314) C8.1@27.94,58.928 28.1,58.768 U4.9@31.083,58.768
NetC13_2: C13.2 C14.2 C15.2 C16.2 FB1.1 U4.23 U4.30 U4.42 | length 42.6
  Top Layer w0.254: U4.42@35.433,64.118 35.433,65.532 35.687,65.786 v1(35.687,65.913) ; U4.42@35.433,64.761 cw(c36.839,64.761) v1@35.845,65.755 ; 35.433,65.375 cw(c36.225,65.375) v1@35.665,65.935 ; U4.30@39.283,59.768 38.051,59.768 37.433,59.15 U4.23@37.433,55.918 37.433,54.388 38.1,53.721 v2(40.894,53.721) ; v2@40.489,53.316 ccw(c39.511,52.338) 39.511,53.721 ccw(c39.511,55.104) v2@40.489,54.126 ; v2@40.668,53.495 ccw(c40.124,52.951) 40.124,53.721 ccw(c40.124,54.491) v2@40.668,53.947
  Top Layer w0.508: v2@40.894,53.595 FB1.1@42.671,53.595 ; v2@41.188,53.595 cw(c41.188,52.239) FB1.1@42.147,53.198 ; v2@41.209,53.406 cw(c41.666,52.949) 41.666,53.595 ; v2@41.209,54.036 ccw(c42.275,55.102) FB1.1@42.275,53.595
  Bottom Layer w0.254: v1@35.687,65.69 cw(c35.687,64.845) 36.284,65.443 ; v1(35.687,65.913) 35.814,65.913 36.449,65.278 36.449,64.77
  Bottom Layer w0.508: C15.2@36.449,63.5 36.449,64.77 36.83,65.151 38.608,65.151 39.37,64.389 39.37,62.357 C14.2@37.973,60.96 C16.2@37.973,55.88 39.921,53.932 ; v2@40.48,53.554 ccw(c39.921,53.329) 39.921,53.932 ; v2(40.894,53.721) 40.683,53.932 39.921,53.932
NetC17_1: C17.1 U4.43 Y1.1 | length 19.5
  Top Layer w0.254: U4.43@34.933,64.118 34.933,67.699 Y1.1@37.338,70.104 C17.1@37.338,73.914 ; Y1.1@36.703,70.104 cw(c35.17,70.104) 36.254,69.02 cw(c37.338,67.936) Y1.1@37.338,69.469 ; Y1.1@36.889,70.553 ccw(c35.805,71.637) 37.338,71.637 ccw(c38.871,71.637) Y1.1@37.787,70.553 ; Y1.1@36.957,70.104 cw(c36.037,70.104) 36.688,69.454 cw(c37.338,68.803) Y1.1@37.338,69.723 ; Y1.1@37.069,70.373 ccw(c36.418,71.024) 37.338,71.024 ccw(c38.258,71.024) Y1.1@37.607,70.373 ; C17.1@37.158,73.734 cw(c36.725,73.301) 37.338,73.301 cw(c37.951,73.301) C17.1@37.518,73.734
NetC18_1: C18.1 U4.44 Y1.2 | length 20.3
  Top Layer w0.254: Y1.2@31.798,70.542 ccw(c31.301,71.04) 32.004,71.04 ; C18.1@31.824,73.734 cw(c31.391,73.301) 32.004,73.301 cw(c32.617,73.301) C18.1@32.184,73.734 ; 32.004,70.986 ccw(c33.14,70.986) Y1.2@32.337,70.183 ; 32.004,71.6 ccw(c33.753,71.6) Y1.2@32.516,70.363 ; 32.004,72.213 ccw(c34.367,72.213) Y1.2@32.696,70.542 ; C18.1@32.004,73.914 32.004,70.336 Y1.2@32.247,70.093 34.433,67.907 U4.44@34.433,64.118 ; Y1.2@32.247,69.458 cw(c32.247,67.925) 33.331,69.009 cw(c34.415,70.093) Y1.2@32.882,70.093 ; Y1.2@32.247,69.712 cw(c32.247,68.792) 32.897,69.443 cw(c33.548,70.093) Y1.2@32.628,70.093
NetC19_2: C19.2 R42.1 R43.1 | length 11.8
  Top Layer w0.254: v1(22.86,65.913) C19.2@24.13,65.913 ; v1@23.018,65.755 cw(c23.398,65.375) 23.398,65.913 cw(c23.398,66.451) v1@23.018,66.071 ; C19.2@23.95,65.733 ccw(c23.517,65.3) 23.517,65.913 ccw(c23.517,66.526) C19.2@23.95,66.093
  Bottom Layer w0.254: v1(22.86,65.913) 24.003,65.913 R42.1@24.13,66.04 R43.1@24.13,62.23 ; v1@23.018,65.755 cw(c23.398,65.375) 23.398,65.913 cw(c23.398,66.451) v1@23.018,66.071 ; 23.21,65.913 ccw(c23.21,66.96) R42.1@23.95,66.22 ; R43.1@23.95,62.41 ccw(c23.517,62.843) 24.13,62.843 ccw(c24.743,62.843) R43.1@24.31,62.41 ; R42.1@23.95,65.86 cw(c23.517,65.427) 24.13,65.427 cw(c24.743,65.427) R42.1@24.31,65.86
NetC20_2: C20.2 R44.1 R45.1 | length 13.7
  Top Layer w0.254: v1@22.965,58.315 cw(c23.521,57.764) 23.521,58.547 ; v1(22.987,58.293) 23.241,58.547 C20.2@24.13,58.547 ccw(c24.13,57.162) v1@23.146,58.136 ; C20.2@23.95,58.367 ccw(c23.517,57.934) 23.517,58.547 ccw(c23.517,59.16) C20.2@23.95,58.727
  Bottom Layer w0.254: v1@23.145,58.135 cw(c23.525,57.755) 23.525,58.293 cw(c23.525,58.831) v1@23.145,58.451 ; 23.444,58.293 ccw(c23.444,59.101) R44.1@24.13,58.674 ; R44.1@23.914,58.808 cw(c22.987,59.385) v1(22.987,58.293) 23.749,58.293 R44.1@24.13,58.674 ; R45.1@23.95,55.044 ccw(c23.517,55.477) 24.13,55.477 ccw(c24.743,55.477) R45.1@24.31,55.044 ; R44.1@23.95,58.494 cw(c23.517,58.061) 24.13,58.061 cw(c24.743,58.061) R44.1@24.31,58.494 ; R45.1@24.13,54.864 R44.1@24.13,58.674
NetD2_1: D2.1 R29.1 | length 7.3
  Top Layer w0.254: R29.1@111.252,2.54 D2.1@114.706,2.54 ; R29.1@111.432,2.36 cw(c111.865,1.927) 111.865,2.54 cw(c111.865,3.153) R29.1@111.432,2.72 ; 113.235,2.54 ccw(c113.235,4.2) D2.1@114.409,3.026 ; D2.1@114.409,2.308 ccw(c113.848,1.747) 113.848,2.54 ccw(c113.848,3.587) D2.1@114.589,2.847
  Top Layer w0.508: D2.1@114.706,2.54 D2.1@114.833,2.667
NetD3_2: D3.2 U4.34 | length 8.7
  Top Layer w0.254: U4.34@39.283,61.768 42.79,61.768 D3.2@43.252,62.23 ; 41.236,61.768 ccw(c41.236,63.946) D3.2@42.776,62.406 ; 41.849,61.768 ccw(c41.849,63.333) D3.2@42.956,62.226 ; 42.018,61.768 cw(c42.018,60.696) D3.2@42.776,61.454 ; D3.2@42.463,61.768 ccw(c42.463,62.719) D3.2@43.135,62.047
NetL1_1: L1.1 U2.2 V1.2 | length 23.5
  Top Layer w1: V1.2@125.476,10.16 128.143,10.16 129.667,8.636 L1.1@132.969,8.636 ; V1.2@125.83,9.806 cw(c126.683,8.953) 126.683,10.16 cw(c126.683,11.367) V1.2@125.83,10.514 ; 129.283,9.02 ccw(c130.842,10.578) L1.1@130.842,8.374 ; L1.1@129.874,8.429 ccw(c130.318,8.874) L1.1@130.61,8.317 ; L1.1@132.842,8.509 L1.1@132.969,8.636 ; L1.1@135.196,7.52 cw(c137.889,4.827) 137.889,8.636 ; U2.2@140.716,8.714 140.638,8.636 L1.1@132.969,8.636
NetLED1_1: LED1.1 RE1.2 | length 7.4
  Top Layer w0.254: LED1.1@155.253,17.548 cw(c154.781,17.076) 155.448,17.076 ; v1@155.29,16.795 ccw(c154.91,17.175) 155.448,17.175 ccw(c155.986,17.175) v1@155.606,16.795 ; v1@155.448,16.627 cw(c156.496,16.627) LED1.1@155.901,17.489 ; v1(155.448,16.637) 155.448,17.678 LED1.1@155.677,17.907 ; 155.448,17.111 cw(c156.162,17.111) LED1.1@155.756,17.698
  Bottom Layer w0.254: RE1.2@155.141,17.6 cw(c154.708,17.167) 155.321,17.167 cw(c155.934,17.167) RE1.2@155.501,17.6 ; RE1.2@155.321,17.482 ccw(c156.293,17.482) v1@155.606,16.795 ; RE1.2@155.321,17.78 155.321,16.764 v1(155.448,16.637)
NetLED2_1: LED2.1 RE2.2 | length 7.8
  Top Layer w0.254: LED2.1@155.677,21.717 156.477,20.917 v1(156.477,20.828) ; LED2.1@155.768,21.21 cw(c155.813,20.319) 156.444,20.95 cw(c156.97,21.476) LED2.1@156.24,21.619 ; LED2.1@156.033,21.361 cw(c155.501,20.828) v1@156.254,20.828 ; LED2.1@156.248,21.146 ccw(c156.477,21.374) v1@156.477,21.051
  Bottom Layer w0.254: RE2.2@155.321,21.336 cw(c155.321,19.772) v1@156.427,20.878 ; 155.993,21.312 ccw(c155.321,20.639) RE2.2@155.321,21.59 155.715,21.59 v1(156.477,20.828) ; v1@156.254,20.828 ccw(c155.715,20.828) 156.096,21.209 ccw(c156.477,21.589) v1@156.477,21.051
NetLED3_1: LED3.1 RE3.2 | length 8.3
  Top Layer w0.254: LED3.1@155.677,25.781 155.804,25.654 v1(157.099,25.654) cw(c157.099,26.914) LED3.1@156.132,26.107 ; LED3.1@155.937,25.944 ccw(c156.556,26.461) 156.556,25.654 ; LED3.1@156.101,25.422 cw(c156.662,24.861) 156.662,25.654 ; v1@156.941,25.496 ccw(c156.561,25.116) 156.561,25.654 ccw(c156.561,26.192) v1@156.941,25.812
  Bottom Layer w0.254: RE3.2@155.321,25.654 v1(157.099,25.654) ; RE3.2@155.501,25.474 cw(c155.934,25.041) 155.934,25.654 cw(c155.934,26.267) RE3.2@155.501,25.834 ; v1@156.941,25.496 ccw(c156.561,25.116) 156.561,25.654 ccw(c156.561,26.192) v1@156.941,25.812
NetLED4_1: LED4.1 RE4.2 | length 6.9
  Top Layer w0.254: LED4.1@155.677,29.591 v1(156.845,29.591) ; LED4.1@156.128,29.261 cw(c156.845,28.647) v1(156.845,29.591) ; LED4.1@156.128,29.921 ccw(c156.845,30.535) v1(156.845,29.591) ; v1@156.687,29.433 ccw(c156.307,29.053) 156.307,29.591 ccw(c156.307,30.129) v1@156.687,29.749
  Bottom Layer w0.254: RE4.2@155.321,29.464 155.448,29.591 v1(156.845,29.591) ; RE4.2@155.501,29.284 cw(c156.241,28.544) 156.241,29.591 ; v1@156.687,29.433 ccw(c156.307,29.053) 156.307,29.591 ccw(c156.307,30.129) v1@156.687,29.749
NetLED5_1: LED5.1 TL1.2 | length 57.8
  Top Layer w0.254: LED5.1@125.222,61.468 v1(127.508,61.468) ; LED5.1@125.646,61.109 cw(c126.513,60.242) 126.513,61.468 cw(c126.513,62.694) LED5.1@125.646,61.827 ; v1@127.35,61.31 ccw(c126.97,60.93) 126.97,61.468 ccw(c126.97,62.006) v1@127.35,61.626
  Bottom Layer w0.254: v1@127.35,61.31 cw(c126.97,60.93) 127.508,60.93 cw(c128.046,60.93) v1@127.666,61.31 ; v1(127.508,61.468) 127.508,31.242 136.017,22.733 140.094,22.733 141.072,21.755 141.072,21.742 142.407,20.407 TL1.2@144.077,20.407 ; TL1.2@143.233,20.299 ccw(c142.972,20.039) 142.972,20.407 ccw(c142.972,20.775) TL1.2@143.233,20.515
NetLED5_2: LED5.2 RH1.1 | length 12
  Top Layer w0.254: v1(120.396,61.722) LED5.2@123.012,61.722 ; v1@120.554,61.564 cw(c120.934,61.184) 120.934,61.722 cw(c120.934,62.26) v1@120.554,61.88 ; 121.107,61.722 cw(c121.107,59.628) LED5.2@122.588,61.109 ; 121.721,61.722 cw(c121.721,60.242) LED5.2@122.767,61.288 ; LED5.2@122.588,61.827 cw(c122.334,62.081) 122.334,61.722 cw(c122.334,60.855) LED5.2@122.947,61.468
  Bottom Layer w0.254: RH1.1@118.364,61.72 v1@120.394,61.72 ; RH1.1@118.85,61.361 cw(c119.717,60.494) 119.717,61.72 cw(c119.717,62.947) RH1.1@118.85,62.08 ; 119.854,61.72 ccw(c119.854,62.264) v1@120.238,61.88 ; 119.862,61.72 cw(c119.862,61.188) v1@120.238,61.564
NetLED6_1: LED6.1 TL2.2 | length 18.4
  Top Layer w0.254: LED6.1@132.021,61.462 134.36,61.462 v1(134.366,61.468) ; LED6.1@132.445,61.103 cw(c133.312,60.236) 133.312,61.462 cw(c133.312,62.689) LED6.1@132.445,61.821 ; 133.814,61.462 ccw(c133.814,62.02) v1@134.208,61.626 ; 133.842,61.462 cw(c133.842,60.944) v1@134.208,61.31
  Bottom Layer w0.254: v1@134.208,61.31 cw(c133.828,60.93) 134.366,60.93 cw(c134.904,60.93) v1@134.524,61.31 ; v1(134.366,61.468) 134.366,60.452 136.779,58.039 142.24,58.039 142.454,58.253 TL2.2@144.077,58.253 ; TL2.2@143.233,58.145 ccw(c142.972,57.885) 142.972,58.253 ccw(c142.972,58.621) TL2.2@143.233,58.361
NetLED6_2: LED6.2 RH2.1 | length 14.2
  Top Layer w0.254: v1(127.381,62.865) 127.508,62.992 127.762,62.992 129.032,61.722 129.551,61.722 LED6.2@129.811,61.462 ; 128.104,62.65 ccw(c129.746,64.293) LED6.2@129.746,61.97 ; 128.537,62.217 ccw(c129.746,63.426) LED6.2@129.746,61.716 ; 128.971,61.783 ccw(c129.746,62.558) LED6.2@129.746,61.462 ; LED6.2@129.147,61.722 ccw(c129.147,62.061) LED6.2@129.387,61.821
  Bottom Layer w0.254: RH2.1@124.714,61.466 126.24,62.992 127.254,62.992 v1(127.381,62.865) ; RH2.1@124.841,61.974 ccw(c124.841,62.894) 125.491,62.244 ; RH2.1@125.095,61.466 cw(c126.015,61.466) 125.364,62.117 ; RH2.1@125.349,61.466 cw(c126.882,61.466) 125.798,62.55 ; 126.536,62.992 cw(c126.536,62.02) v1@127.223,62.707
NetLED7_1: LED7.1 RH3.1 | length 3.7
  Top Layer w1: LED7.1@124.689,19.685 124.814,19.81 RH3.1@127.762,19.81 ; LED7.1@124.849,19.59 cw(c125.382,19.056) LED7.1@125.382,19.81
NetLED7_2: LED7.2 TL3.7 | length 9.8
  Top Layer w0.254: v1@121.57,19.273 cw(c121.95,18.893) 121.95,19.431 cw(c121.95,19.969) v1@121.57,19.589 ; v1@121.746,19.431 ccw(c121.746,19.87) LED7.2@122.169,19.753 ; LED7.2@121.801,19.431 cw(c121.801,19.072) LED7.2@122.055,19.326 ; LED7.2@121.924,19.821 cw(c121.412,19.962) v1(121.412,19.431) 122.377,19.431 122.479,19.533 LED7.2@122.479,19.685
  Bottom Layer w0.254: TL3.7@120.337,22.265 121.245,22.265 122.479,21.031 122.479,20.498 v1(121.412,19.431) ; TL3.7@121.074,22.113 cw(c121.074,21.331) 121.626,21.884 ; v1@121.412,19.654 ccw(c121.412,20.192) 121.793,19.812 ccw(c122.173,19.431) v1@121.635,19.431
NetLED8_1: LED8.1 TL1.4 | length 58.5
  Top Layer w0.254: LED8.1@125.222,64.77 v1(127.508,64.77) ; LED8.1@125.646,64.411 cw(c126.513,63.544) 126.513,64.77 cw(c126.513,65.996) LED8.1@125.646,65.129 ; v1@127.35,64.612 ccw(c126.97,64.232) 126.97,64.77 ccw(c126.97,65.308) v1@127.35,64.928
  Bottom Layer w0.254: v1@127.508,64.547 cw(c127.508,64.009) 127.889,64.389 cw(c128.269,64.77) v1@127.731,64.77 ; v1(127.508,64.77) 128.651,63.627 128.651,34.163 136.525,26.289 140.335,26.289 141.605,25.019 141.605,23.622 142.28,22.947 TL1.4@144.077,22.947 ; TL1.4@143.233,22.839 ccw(c142.972,22.579) 142.972,22.947 ccw(c142.972,23.315) TL1.4@143.233,23.055
NetLED8_2: LED8.2 RH4.1 | length 10.2
  Top Layer w0.254: v1(120.396,64.77) LED8.2@123.012,64.77 ; v1@120.554,64.612 cw(c120.934,64.232) 120.934,64.77 cw(c120.934,65.308) v1@120.554,64.928 ; LED8.2@122.588,64.411 ccw(c121.721,63.544) 121.721,64.77 ccw(c121.721,65.996) LED8.2@122.588,65.129
  Bottom Layer w0.254: RH4.1@118.364,64.768 v1@120.394,64.768 ; RH4.1@118.85,64.409 cw(c119.717,63.542) 119.717,64.768 cw(c119.717,65.995) RH4.1@118.85,65.128 ; 119.854,64.768 ccw(c119.854,65.312) v1@120.238,64.928 ; 119.862,64.768 cw(c119.862,64.236) v1@120.238,64.612
NetLED9_1: LED9.1 TL2.4 | length 23.5
  Top Layer w0.254: LED9.1@132.021,64.764 132.269,64.516 v1(134.366,64.516) ; LED9.1@132.086,64.764 ccw(c132.685,65.363) LED9.1@132.685,64.516 ; LED9.1@132.265,64.944 ccw(c133.298,65.977) 133.298,64.516 ; LED9.1@132.445,64.405 cw(c132.713,64.137) LED9.1@132.713,64.516 ; LED9.1@132.445,65.123 ccw(c133.911,66.59) 133.911,64.516 ; v1@134.208,64.358 ccw(c133.828,63.978) 133.828,64.516 ccw(c133.828,65.054) v1@134.208,64.674
  Bottom Layer w0.254: v1@134.366,64.293 cw(c134.366,63.755) 134.747,64.135 cw(c135.127,64.516) v1@134.589,64.516 ; v1(134.366,64.516) 135.636,63.246 135.636,60.274 137.071,58.839 141.008,58.839 141.605,59.436 141.605,60.198 142.2,60.793 TL2.4@144.077,60.793 ; TL2.4@143.233,60.685 ccw(c142.972,60.425) 142.972,60.793 ccw(c142.972,61.161) TL2.4@143.233,60.901
NetLED9_2: LED9.2 RH5.1 | length 13.6
  Top Layer w0.254: v1(127.508,66.294) 128.772,66.294 129.811,65.255 LED9.2@129.811,64.764 ; v1@127.666,66.136 cw(c128.046,65.756) 128.046,66.294 cw(c128.046,66.832) v1@127.666,66.452 ; 128.925,66.141 cw(c127.558,64.773) LED9.2@129.492,64.765 ; 129.356,65.71 cw(c128.416,64.77) LED9.2@129.746,64.764
  Bottom Layer w0.254: RH5.1@124.714,64.767 126.24,66.294 v1(127.508,66.294) ; RH5.1@124.841,65.275 ccw(c124.841,66.191) 125.489,65.543 ; RH5.1@125.095,64.767 cw(c126.019,64.767) 125.366,65.42 ; RH5.1@125.349,64.767 cw(c126.886,64.767) 125.799,65.854 ; v1@127.35,66.136 ccw(c126.97,65.756) 126.97,66.294 ccw(c126.97,66.832) v1@127.35,66.452
NetLED10_1: LED10.1 RH6.1 | length 3.7
  Top Layer w1: LED10.1@124.689,23.495 124.814,23.62 RH6.1@127.762,23.62 ; LED10.1@124.849,23.4 cw(c125.382,22.866) LED10.1@125.382,23.62